# Altium PCB PCB1.PcbDoc
Units mil, origin at the board's own origin, x right, y up, seen from the top; angles counter-clockwise.
Board outline 1380 x 1000 mil, 2 copper layers (Top Layer, Bottom Layer); 8 components, 4 nets, 21 pads, 0 vias.
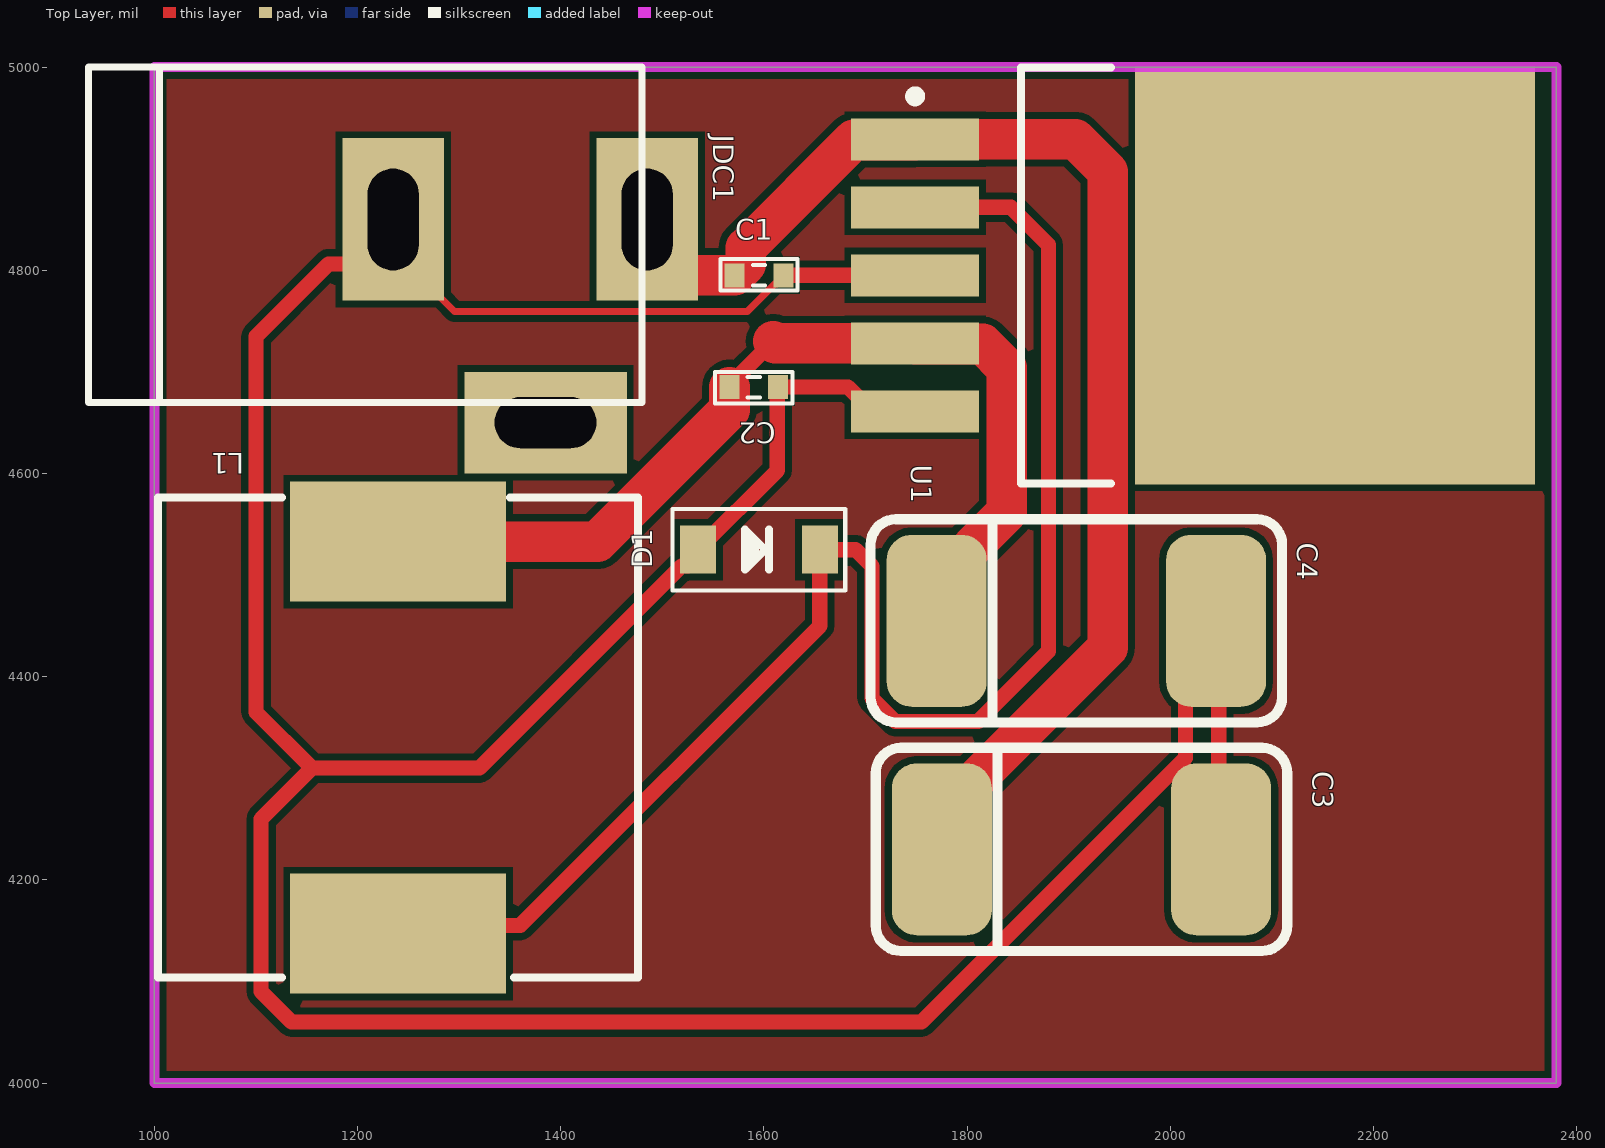
[diagram p0: Top Layer view]
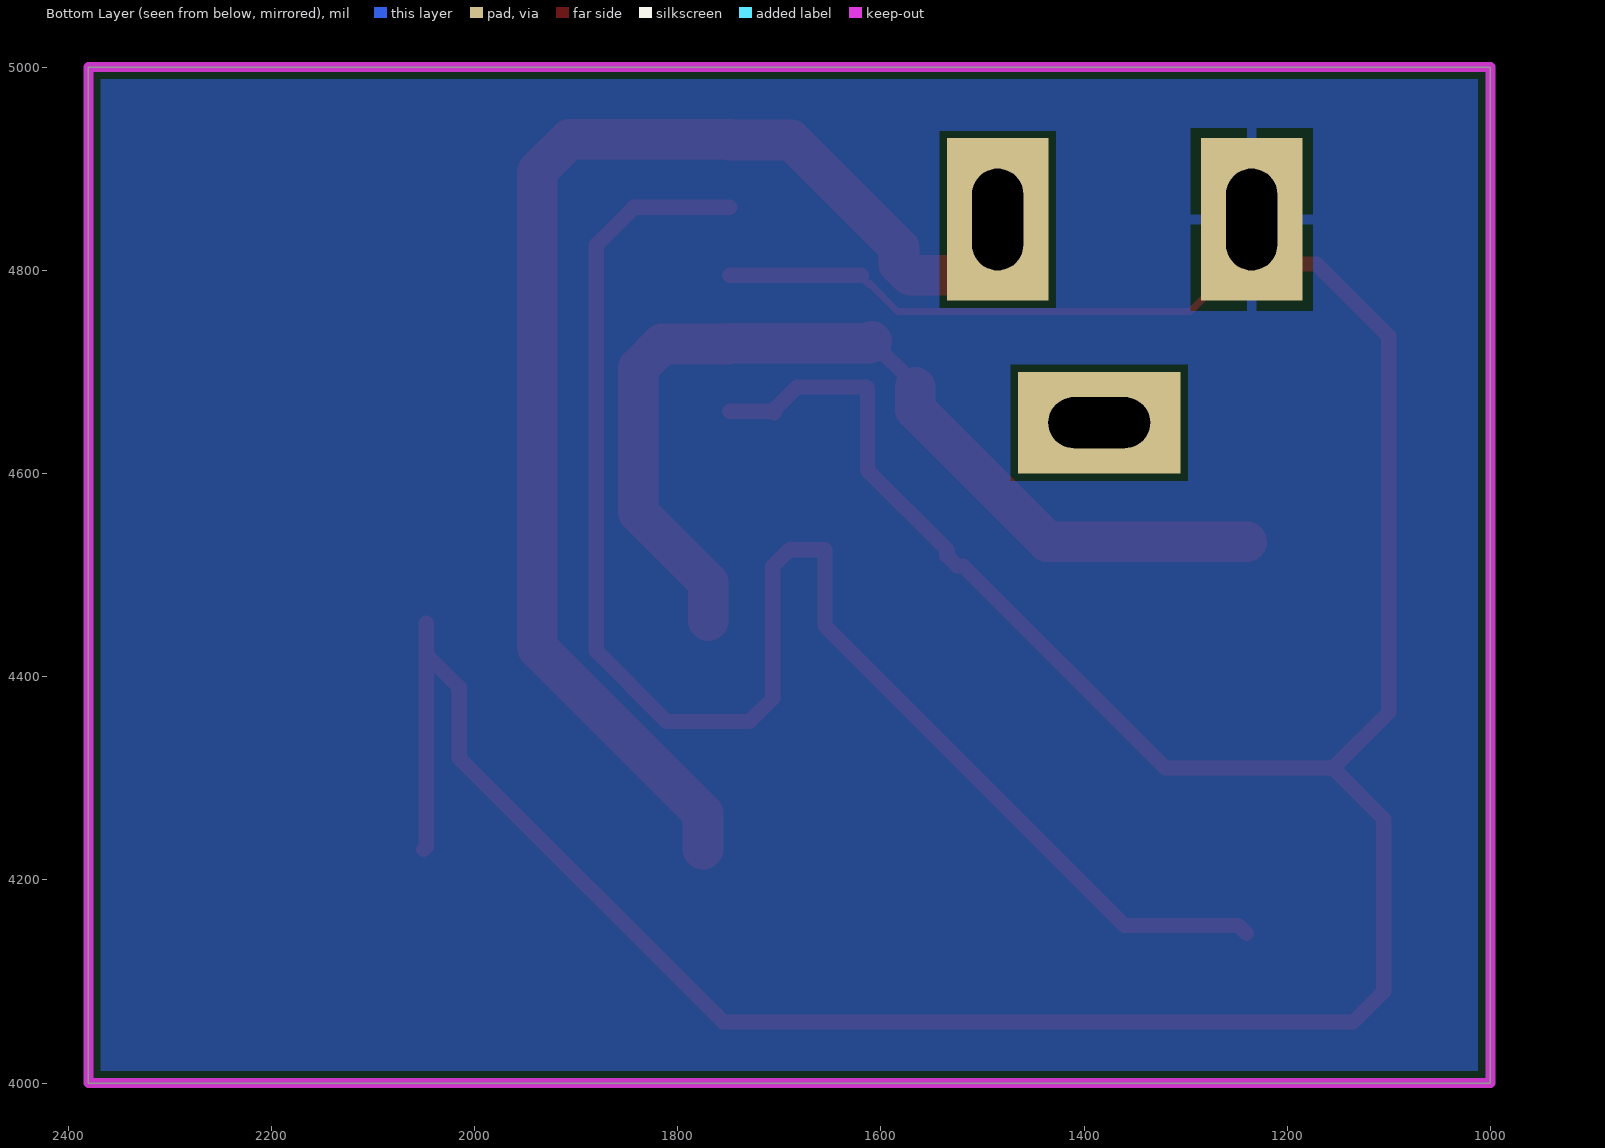
[diagram p1: Bottom Layer view, seen from below]
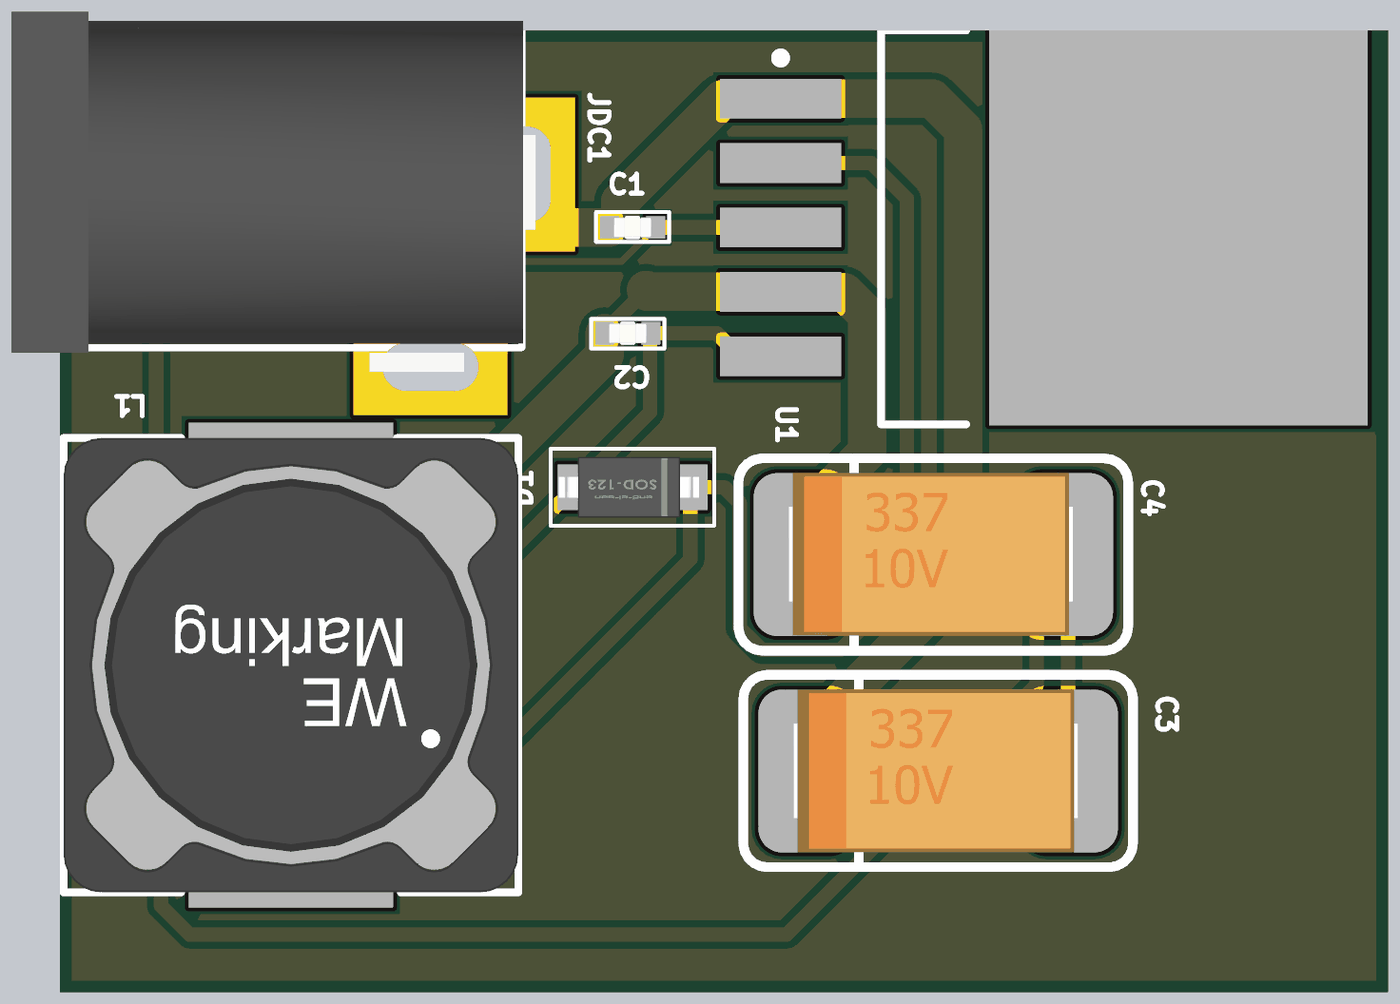
[diagram p2: 3D render of the assembled board from above, using the file's embedded part models]

## Layer stack, top to bottom
Top Solder: solder mask 0.4, Solder Resist, Dk 3.5
Top Layer: signal copper 1.4
Dielectric 1: dielectric 12.6, FR-4, Dk 4.8
Bottom Layer: signal copper 1.4
Bottom Solder: solder mask 0.4, Solder Resist, Dk 3.5

## Board outline
1000,4000 2380,4000 2380,5000 1000,5000

## Design rules (kind name [scope] priority, off if disabled: settings)
Clearance [All] p1: gap=7 ignorepadtopadclearanceinfootprint=FALSE
PolygonConnect [All] p1: connectstyle=Relief reliefconductorwidth=10 reliefentries=4 polygonreliefangle="90 Angle" airgapwidth=10
RoutingVias [All] p1: holewidth=14 width=30 viastyle="Through Hole" minholewidth=14 minwidth=50 maxholewidth=28 maxwidth=50
SolderMaskExpansion [All] p1: expansion=4 istentingtop=FALSE
Width [All] p1: maxlimit=40 minlimit=7 preferedwidth=15
30 further rules are at their usual default settings.

## Components (designator, comment, footprint, x,y, rotation, side; value= is the part's Value field where it differs from the comment)
C1 "1" CAP_0402 1595,4795 r0 top value=33p
C2 "2" CAP_0402 1590,4685 r180 top value=33p
C3 "680uF-18V" CAP_7343 1910,4230 r0 top
C4 "330uF - 10V" CAP_7343 1905,4455 r0 top
D1 "1N5822" DIO-SMD-123 1595,4525 r180 top value="Diode c?m 1N5408"
JDC1 "Jac DC" DC-IN 1360,4750 r0 top
L1 "33uH" L-SMD-M-12x10 1240,4340 r180 top value="150 mH"
U1 "LM2596" TO-263 1985,4795 r0 top

## Footprints (in the part's own frame and the unit in brackets; to place one, negate y for a bottom-side part, rotate by r counter-clockwise, add the part's x,y. Pads: shape width x height; smd on the part's side, far side on the other; paste and mask are expansions set on the pad)
CAP_0402 [mm]
  rect 0.5x0.6 smd: 1(-0.61,0) 2(0.61,0)
  silkscreen extent -0.97,-0.38 0.97,0.41, body extent -0.5,-0.27 0.5,0.26, height 0.35
CAP_7343 [mm] "Capacitor Tantalum 7343"
  rrect50% 2.5x4.3 smd: 1(-3.429,0) 2(3.556,0)
  silkscreen extent -5.08,-2.54 5.21,2.54, body extent -3.75,-2.14 3.75,2.16, height 2.8
DC-IN [mil] "Jac DC input"
  rect 100x160 hole 50 slot 100 at 90 deg: 1(125,100) 2(-125,100)
  rect 160x100 hole 50 slot 100 at 0 deg: 3(25,-100)
  silkscreen extent -425,-80 120,250, body extent -410,-105 134,269, height 434
DIO-SMD-123 [mm]
  rect 0.9x1.2 smd: 1(1.524,0) 2(-1.524,0)
  silkscreen extent -2.16,-1.02 2.16,1.02, body extent -1.76,-0.8 1.94,0.8, height 1.25
L-SMD-M-12x10 [mm] "WE-PDA SMD Shielded Power Inductor, 1210"
  rect 5.4x3 smd: 1(0,4.9) 2(0,-4.9)
  silkscreen extent -6,-6 6,6, body extent -6,-6 6,6, height 9.7
TO-263 [mm]
  rect 3.2x1.05 smd: 1(-6,3.4) 2(-6,1.7) 3(-6,0) 4(-6,-1.7) 5(-6,-3.4)
  rect 10x10.45 smd: 6(4.5,0)
  silkscreen extent -6.12,-5.2 -1.1,5.2, body extent -6.58,-5.2 7.57,5.2, height 4.65

## Part data
C1 C2: library part CapSMD, "Capacitor", LatestRevisionDate=17-Jul-2002, LatestRevisionNote="Re-released for DXP Platform.", PackageReference=RAD-0.3, Published=8-Jun-2000, Publisher="Altium Limited"
C3 C4: library part CAP_TAN_SMD, "Polazied Tantalum Capacitor"
D1: "Schottky Rectifiers"
JDC1: library part DCIN, "Jac DC input"
L1: library part Inductor, "Inductor"
U1: Max Input Voltage="12 V", Max Output Current="3 (6.0 peak) A", Max Output Voltage=mV, Temperature Range="-40 to +125 degC", Category=IC-Power, Min Input Voltage=mV, Min Output Voltage=mV, Mounting Technology="Surface Mount", Status=Unreleased, Supply Voltage=mV

## Nets (pads, with @x,y where several pads share a name; then routed paths per layer and width w, separated by ;. In a path a pad name is that pad's centre, name@x,y a point inside that pad or via, vN(x,y) a via of type N, cw(c..) or ccw(c..) an arc to the next point about the centre after c; other vN are vias at no path point)
3V3: C2.2 C4.1 L1.2 U1.4 | length 982.8
  Top Layer w15: C2.2 1566,4686.97 1609.03,4730
  Top Layer w40: L1.2 1436.1,4532.91 1566,4662.82 C2.2 ; 1609.03,4730 1610.96,4728.07 U1.4 1749.45,4727.4 1815.34,4727.4 1838.77,4703.97 1838.77,4561.7 1770,4492.93 C4.1
+12: C1.1 C3.1 JDC1.1 U1.1 | length 1303.4
  Top Layer w40: JDC1.1 1485,4825 1515,4795 C1.1 1582.16,4806.16 1582.16,4822.16 1688.19,4928.19 1748.11,4928.19 U1.1 ; U1.1 1906.46,4928.9 1938.32,4897.04 1938.32,4428.75 1775,4265.43 C3.1
GND: C1.2 C2.1 C3.2 C4.2 D1.1 JDC1.2 U1.3 U1.5 | length 3573.1
  Top Layer w7: JDC1.2 1235,4820 1295.5,4759.5 1583.5,4759.5 1610.69,4786.69 1612.66,4786.69 1619,4793.03 C1.2
  Top Layer w15: JDC1.2@1192.5,4806.29 1171.29,4806.29 1100,4735 1100,4365 1155,4310 ; C1.2 U1.3 ; U1.5@1704.81,4659.5 U1.5@1706.46,4661.14 ; U1.5 U1.5@1706.46,4661.14 ; C4.2@2045,4419.57 2015,4389.57 2015,4320 1755,4060 1135,4060 1105,4090 1105,4260 1155,4310 ; C4.2@2047.5,4452.5 2047.5,4232.5 C3.2 ; 1155,4310 1320,4310 1518.88,4508.88 1524.78,4508.88 1535,4519.09 D1.1 1613.11,4603.11 1613.11,4684.11 C2.1 1682.6,4685 U1.5@1706.46,4661.14
NetD1_2: D1.2 L1.1 U1.2 | length 1561.8
  Top Layer w15: L1.1 1247.93,4155.01 1360.01,4155.01 1655,4450 D1.2 1690,4525 1706.29,4508.71 1706.29,4378.76 1729.2,4355.85 1810.8,4355.85 1880,4425.05 1880,4825 1843.07,4861.93 U1.2
pads on no net: JDC1.3 U1.6
copper on no net: | length 35
  Top Layer w15: 1388.51,4653.51 1385,4650 1415,4650

## Polygon pours and split planes (outlines as drawn)
no net on Top Layer "NONET_L01_P000" (solid, pour order 0): 995,5000 2375,5000 2375,4005 1005,4005 1005,5000 1000,5005
GND on Bottom Layer "GND_L02_P001" (solid, remove dead copper, pour order 1): 1000,5000 1000,4005 2375,4005 2375,5000

## Keep-outs
Keep-Out Layer:
  the board outline again, w10